# Altium PCB PCB1.PcbDoc
Units mm, origin at the board's own origin, x right, y up, seen from the top; angles counter-clockwise.
Board outline 99.69 x 96.27 mm, 2 copper layers (Top Layer, Bottom Layer); 54 components, 48 nets, 197 pads, 105 vias.
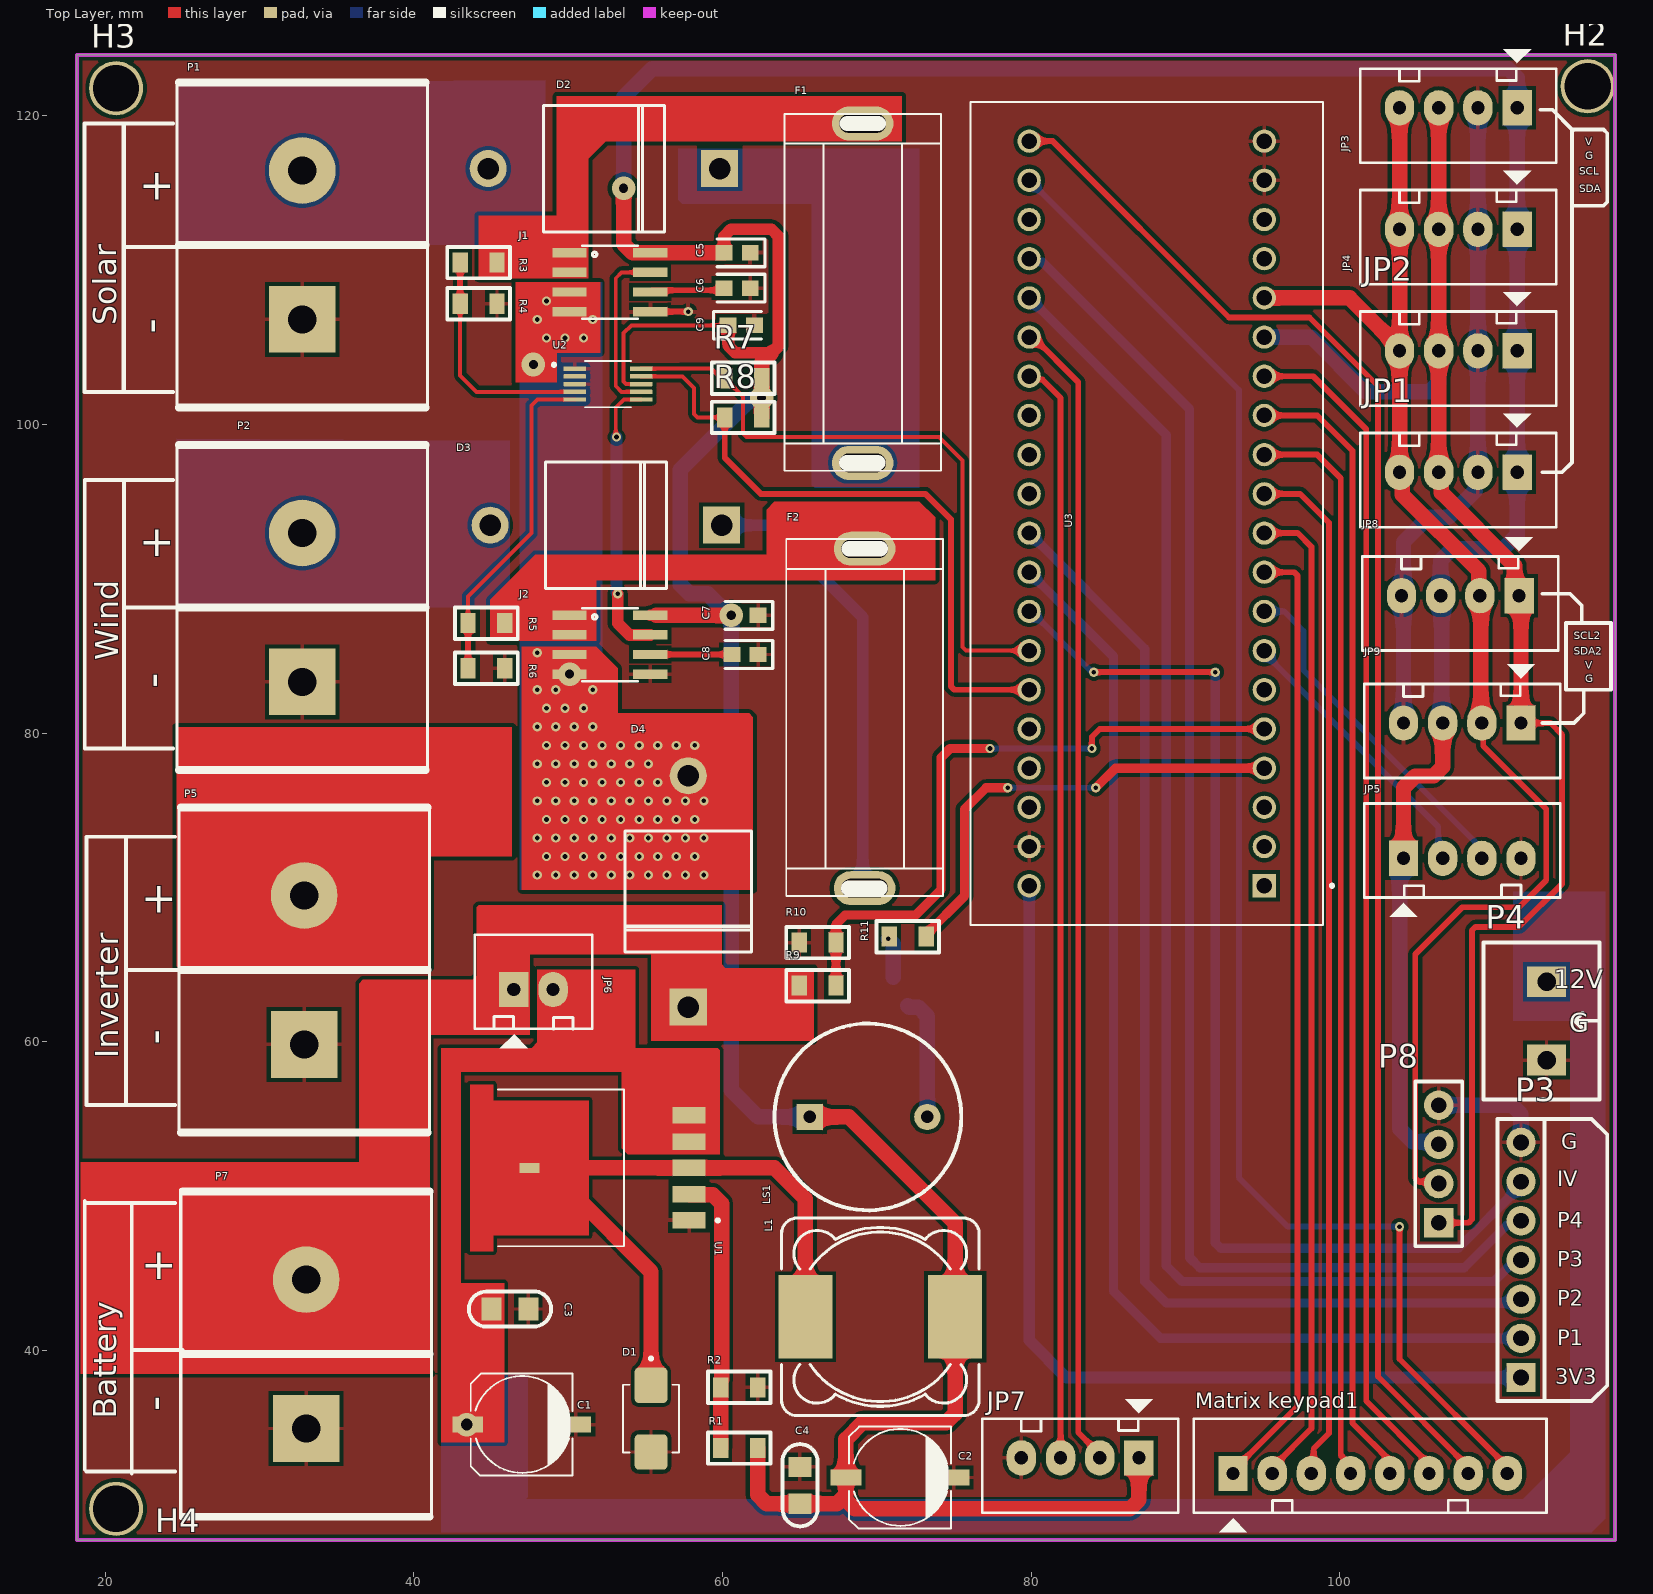
[diagram p0: Top Layer view]
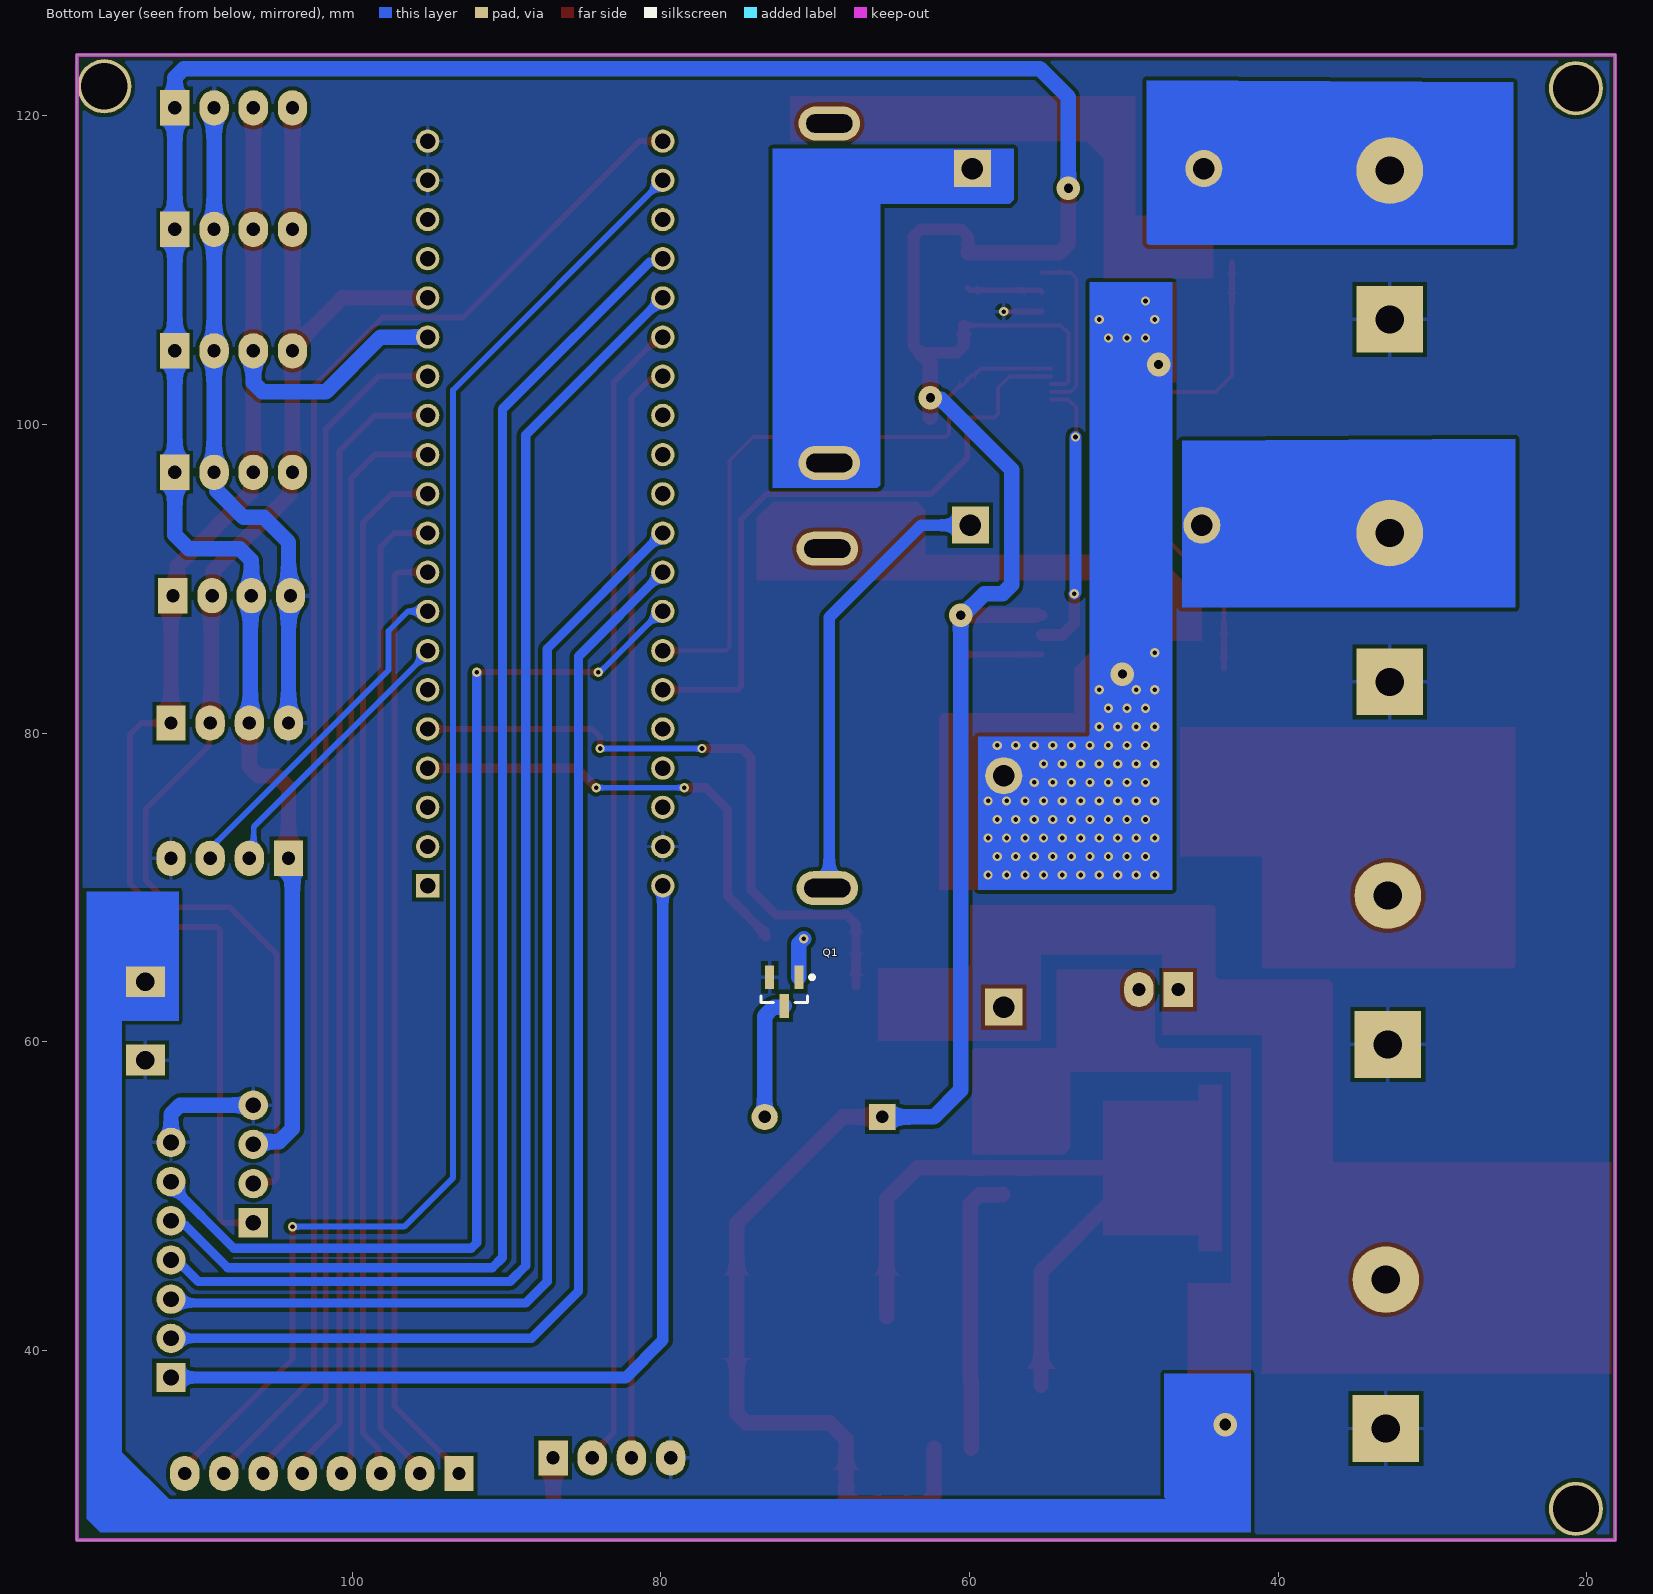
[diagram p1: Bottom Layer view, seen from below]
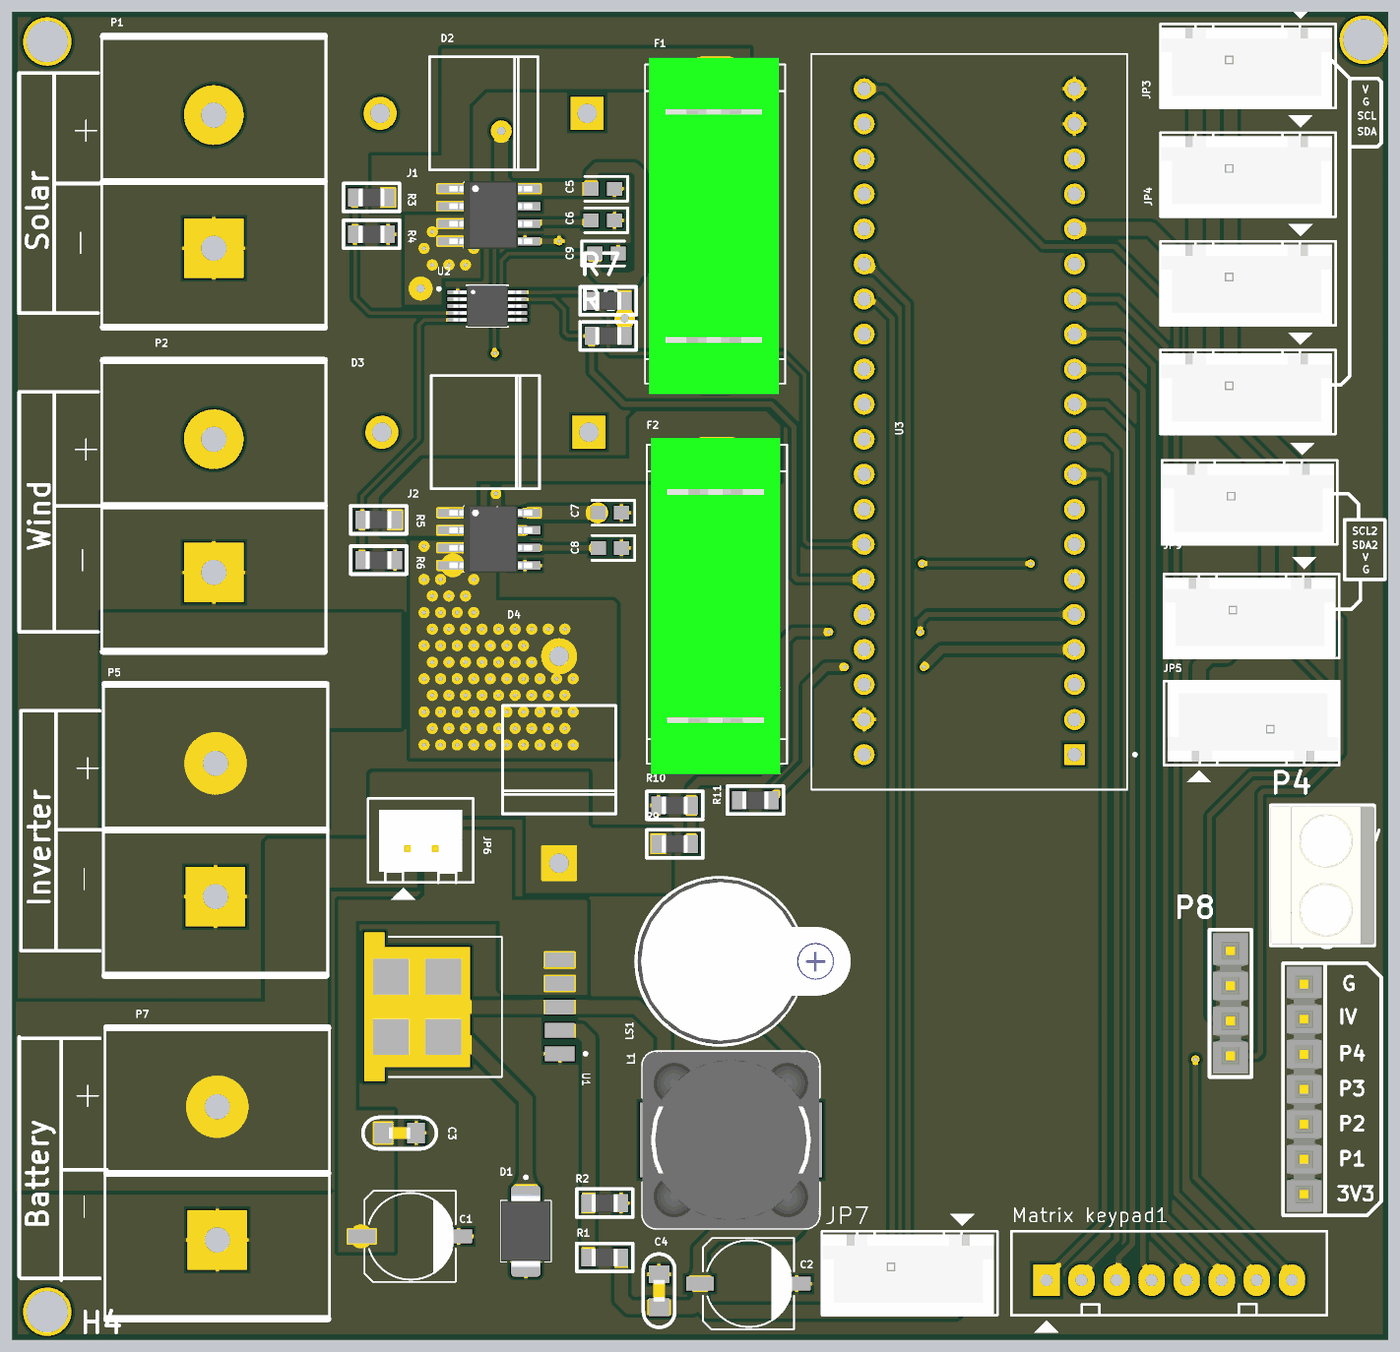
[diagram p2: 3D render of the assembled board from above, using the file's embedded part models]

## Layer stack, top to bottom
Top Solder: solder mask 0.0102, Solder Resist, Dk 3.5
Top Layer: signal copper 0.0356
Dielectric 1: dielectric 0.32, FR-4, Dk 4.8
Bottom Layer: signal copper 0.0356
Bottom Solder: solder mask 0.0102, Solder Resist, Dk 3.5

## Board outline
18.161,27.686 18.161,123.952 117.856,123.952 117.856,27.686

## Design rules (kind name [scope] priority, off if disabled: settings)
Clearance [All] p1: gap=0.254 ignorepadtopadclearanceinfootprint=TRUE
PolygonConnect [All] p1: connectstyle=Relief reliefconductorwidth=0.254 reliefentries=4 polygonreliefangle="90 Angle" airgapwidth=0.254
RoutingVias [All] p1: holewidth=0.3 width=0.6 viastyle="Through Hole" minholewidth=0.3 minwidth=0.6 maxholewidth=3 maxwidth=3
SolderMaskExpansion [All] p1: expansion=0.102 istentingtop=FALSE
Width [All] p1: maxlimit=3 minlimit=0.254 preferedwidth=0.381 toplayer_maxwidth=1.5 minimp=50.000000 maximp=50.000000 favimp=50.000000
30 further rules are at their usual default settings.

## Classes and differential pairs
component class MCU: H2 H3 H4 JP7 JP8 JP9 LS1 "Matrix keypad1" P8 Q1 R11 U3
component class Mainboard: C1 C2 C3 C4 C5 C6 C7 C8 C9 D1 D2 D3 D4 F1 F2 J1 J2 JP1 JP2 JP3 JP4 JP5 JP6 L1 P1 P2 P3 P4 P5 P7 R1 R2 R3 R4 R5 R6 R7 R8 R9 R10 U1 U2

## Components (designator, comment, footprint, x,y, rotation, side; value= is the part's Value field where it differs from the comment)
C1 "47uF" CAP_SMD_6_3MM 46.99,35.179 r0 top
C2 "47uF" CAP_SMD_6_3MM 71.501,31.75 r0 top
C3 "Cap Non-pol" C-NP-0805 46.228,42.672 r180 top value=0.1uF
C4 "Cap Non-pol" C-NP-0805 65.024,31.242 r270 top value=0.1uF
C5 "0.1uF" C1608-0603 60.96,111.125 r180 top
C6 "1nF" C1608-0603 60.96,108.839 r180 top
C7 "0.1uF" C1608-0603 61.468,87.63 r180 top
C8 "1nF" C1608-0603 61.468,85.09 r180 top
C9 "1uF" C1608-0603 61.214,106.426 r0 top
D1 "SS24" DIOM5336X265N 55.372,35.56 r270 top
D2 "" D8x7,5 59.817,116.586 r180 top
D3 "" D8x7,5 59.944,93.472 r180 top
D4 "" D8x7,5 57.785,62.23 r90 top
F1 "FUSE" "FUSE 24.5x9.5" 69.088,97.507 r90 top
F2 "FUSE" "FUSE 24.5x9.5" 69.215,69.948 r90 top
H2 "Hole" "LO KHOAN 3MM" 116.078,121.92 r0 top
H3 "Hole" "LO KHOAN 3MM" 20.701,121.793 r0 top
H4 "Hole" "LO KHOAN 3MM" 20.701,29.718 r0 top
J1 "ACS712" SO08 52.705,109.22 r270 top
J2 "ACS712" SO08 52.705,85.725 r270 top
JP1 "JP4" CON4 111.506,96.901 r180 top value="Connector 4"
JP2 "JP4" CON4 111.506,104.775 r180 top value="Connector 4"
JP3 "JP4" CON4 111.506,120.523 r180 top value="Connector 4"
JP4 "JP4" CON4 111.506,112.649 r180 top value="Connector 4"
JP5 "JP4" CON4 104.14,71.882 r0 top value="Connector 4"
JP6 "Switch" CON2 46.482,63.373 r0 top value="Connector 2"
JP7 "GPS" CON4 86.995,33.02 r180 top value="Connector 4"
JP8 "LCD_2004" CON4 111.633,88.9 r180 top value="Connector 4"
JP9 "Backup" CON4 111.76,80.645 r180 top value="Connector 4"
L1 "Inductor" "INDUCTOR 12.5x12.5" 70.231,42.164 r0 top value=10mH
LS1 "Buzzer" Buzzer 65.659,55.118 r0 top
"Matrix keypad1" "JP8" CON8 93.091,32.004 r0 top value="Connector 8"
P1 "Solar Power" "PTBlock 2" 32.766,106.807 r90 top
P2 "Wind Power" "PTBlock 2" 32.766,83.312 r90 top
P3 "Header 7" "Header 7" 111.76,38.227 r90 top
P4 "Header 2 - M" "Medium - Header 2" 113.411,61.341 r270 top
P5 "Header 2" "PTBlock 2" 32.893,59.817 r90 top
P7 "Battery" "PTBlock 2" 33.02,34.925 r90 top
P8 "Header 4" "Header 4" 106.426,48.26 r90 top
Q1 "C1815" "SOT23 [C1815]" 72.009,63.246 r270 bottom
R1 "RESISTOR" R-0805 61.087,33.655 r0 top value=10.5
R2 "RESISTOR" R-0805 61.087,37.592 r180 top value=2k
R3 "RESISTOR" R-0805 44.196,110.49 r0 top value=1K
R4 "RESISTOR" R-0805 44.196,107.823 r180 top value=1K
R5 "RESISTOR" R-0805 44.704,87.122 r0 top value=1K
R6 "RESISTOR" R-0805 44.704,84.201 r180 top value=1K
R7 "RESISTOR" R-0805 61.341,102.997 r180 top value=1K
R8 "RESISTOR" R-0805 61.341,100.457 r180 top value=1K
R9 "RESISTOR" R-0805 66.167,63.627 r180 top value=1K
R10 "RESISTOR" R-0805 66.167,66.421 r0 top value=1K
R11 "RESISTOR" R-0805 72.009,66.802 r180 top value=100R
U1 "XL4015" CONV_XL4015 47.498,51.816 r180 top
U2 "ADS1115IDGSR" SOP50P490X110-10N 52.578,102.616 r0 top
U3 "ZC323000" MODULE_ZC323000 87.503,94.234 r180 top

## Footprints (in the part's own frame and the unit in brackets; to place one, negate y for a bottom-side part, rotate by r counter-clockwise, add the part's x,y. Pads: shape width x height; smd on the part's side, far side on the other; paste and mask are expansions set on the pad)
Buzzer [mil] "Buzzer; Solder Pad 35mil"
  rect 67x67 hole 32: 1(0,0)
  round 67 hole 32: 2(300,0)
  silkscreen extent -90,-238 387,238, body extent -86,-236 522,236, height 177
C1608-0603 [mm] "Capacitor Chip 0603 package"
  rect 1.1x1 smd: 1(-0.843,0.001) 2(0.857,0.001)
  silkscreen extent -1.79,-0.9 1.31,0.9, body extent -0.71,-0.43 0.71,0.43, height 0.81
C-NP-0805 [mm] "Chip Capacitor; Non-polarized; Body 2.0 x 1.3 mm (LxW typ) [2012]"
  rect 1.3x1.5 smd: 1(-1.194,0) 2(1.194,0)
  silkscreen extent -2.67,-1.14 2.66,1.14, body extent -0.8,-0.43 0.8,0.43, height 0.79
CAP_SMD_6_3MM [mm] "47uF 25V"
  rect 2x1.016 smd: 1(-3.5,0) 2(3.5,0)
  silkscreen extent -3.3,-3.3 3.3,3.3, body extent -3.79,-3.25 3.75,3.25, height 5.52
CON2 [mil] "CON2"
  rect 75x90 hole 34: 1(0,0)
  oval 75x90 hole 34: 2(100,0)
  silkscreen extent -100,-150 200,140, body extent -68,-70 168,107, height 236
CON4 [mil] "CON4"
  rect 75x90 hole 34: 1(0,0)
  oval 75x90 hole 34: 2(100,0) 3(200,0) 4(300,0)
  silkscreen extent -100,-150 400,140, body extent -90,-90 398,136, height 276
CON8 [mil] "CON8"
  rect 75x90 hole 34: 1(0,0)
  oval 75x90 hole 34: 2(100,0) 3(200,0) 4(300,0) 5(400,0) 6(500,0) 7(600,0) 8(700,0)
  silkscreen extent -100,-150 800,140
CONV_XL4015 [mm]
  rect 2.16x1.07 smd: 1(-10.335,3.4) 2(-10.335,1.7) 3(-10.335,0) 4(-10.335,-1.7) 5(-10.335,-3.4)
  rect 1.27x0.635 smd paste-2 mask+0: 3.1(0,0)
  Top Layer region: 3.835,-5.4 2.365,-5.4 2.365,-4.35 -3.835,-4.35 -3.835,4.35 2.365,4.35 2.365,5.4 3.835,5.4
  silkscreen extent -12.3,-5.08 2.05,5.08
D8x7,5 [mm]
  round 2.4 hole 1.4: A(15,0)
  rect 2.4x2.4 hole 1.4: K(0,0)
  silkscreen extent 3.57,-4.1 11.42,4.1
DIOM5336X265N [mm]
  rrect25% 2.29x2.12 smd: A(2.16,0) C(-2.16,0)
  silkscreen extent -4,-1.81 2.2,1.81, body extent -2.67,-1.81 2.67,1.81, height 2.65
"FUSE 24.5x9.5" [mm]
  oval 2.2x4 hole 1.2 slot 3 at 90 deg: 1(0,0) 2(22,0)
  silkscreen extent -0.51,-5.08 22.62,5.08, body extent -1.28,-4.6 23.12,4.8, height 11.5
"Header 4" [mil] "Connector; Header; 4 Position; Solder Pad 35mil"
  rect 75x75 hole 40: 1(0,0)
  round 75 hole 40: 2(100,0) 3(200,0) 4(300,0)
  silkscreen extent -60,-60 360,60, body extent -50,-50 350,50, height 330
"Header 7" [mil] "Connector; Header; 7 Position; Solder Pad 35mil"
  rect 75x75 hole 40: 1(0,0)
  round 75 hole 40: 2(100,0) 3(200,0) 4(300,0) 5(400,0) 6(500,0) 7(600,0)
  silkscreen extent -60,-60 660,60, body extent -50,-50 650,50, height 330
"INDUCTOR 12.5x12.5" [mm]
  rect 3.5x5.4 smd: 1(-4.85,0) 2(4.85,0)
  silkscreen extent -6.4,-6.4 6.4,6.4, body extent -6.4,-6.4 6.4,6.4, height 8
"LO KHOAN 3MM" [mil]
  round 138 hole 118.1: 1(0,0)
"Medium - Header 2" [mm]
  rect 2x2.5 hole 1.2: 1(-2.54,0) 2(2.54,0)
  silkscreen extent -5.08,-4.08 5.08,3.43, body extent -5,-4.07 5,3.43, height 10
MODULE_ZC323000 [mm]
  rect 1.508x1.508 hole 1: 1(-7.62,24.13)
  round 1.508 hole 1: 2(-7.62,21.59) 3(-7.62,19.05) 4(-7.62,16.51) 5(-7.62,13.97) 6(-7.62,11.43) 7(-7.62,8.89) 8(-7.62,6.35) 9(-7.62,3.81) 10(-7.62,1.27) 11(-7.62,-1.27) 12(-7.62,-3.81) 13(-7.62,-6.35) 14(-7.62,-8.89) 15(-7.62,-11.43) 16(-7.62,-13.97) 17(-7.62,-16.51) 18(-7.62,-19.05) 19(-7.62,-21.59) 20(-7.62,-24.13) 21(7.62,-24.13) 22(7.62,-21.59) 23(7.62,-19.05) 24(7.62,-16.51) 25(7.62,-13.97) 26(7.62,-11.43) 27(7.62,-8.89) 28(7.62,-6.35) 29(7.62,-3.81) 30(7.62,-1.27) 31(7.62,1.27) 32(7.62,3.81) 33(7.62,6.35) 34(7.62,8.89) 35(7.62,11.43) 36(7.62,13.97) 37(7.62,16.51) 38(7.62,19.05) 39(7.62,21.59) 40(7.62,24.13)
  silkscreen extent -12.1,-26.67 11.43,26.67
"PTBlock 2" [mil] "Connector; Terminal; Power; 2 Positions; Solder Pad 35mil"
  rect 170x170 hole 72: 1(0,0)
  round 170 hole 72: 2(380,0)
  silkscreen extent -230,-320 610,320, body extent -245,-324 625,324, height 472
R-0805 [mm] "Chip Resistor; Body 2.0 x 1.3 mm (LxW typ) [2012]"
  rect 1x1.3 smd: 1(-1.194,0) 2(1.194,0)
  silkscreen extent -2.03,-1.02 2.03,1.02, body extent -0.95,-0.65 0.95,0.65, height 0.63
SO08 [mil]
  rect 24x87 smd: 1(-75,-103) 2(-25,-103) 3(25,-103) 4(75,-103) 5(75,103) 6(25,103) 7(-25,103) 8(-75,103)
  silkscreen extent -93,-71 93,71, body extent -96,-113 96,123, height 69
SOP50P490X110-10N [mm]
  rrect25% 1.47x0.28 smd: 1(-2.15,1) 2(-2.15,0.5) 3(-2.15,0) 4(-2.15,-0.5) 5(-2.15,-1) 6(2.15,-1) 7(2.15,-0.5) 8(2.15,0) 9(2.15,0.5) 10(2.15,1)
  silkscreen extent -3.6,-1.5 1.5,1.5, body extent -2.45,-1.5 2.45,1.5, height 1.1
"SOT23 [C1815]" [mm] "SOT23, 3-Leads, Body 3.0x2.6mm (max), Pitch 0.95mm, IPC Medium Density"
  rect 1.55x0.6 smd: 1(-0.925,0.95) 2(-0.925,-0.95) 3(0.925,0)
  silkscreen extent -1.05,-1.5 0.7,1.92, body extent -1.53,-1.5 1.53,1.5, height 1.1

## Part data
C1 C2: library part Cap_Pol, "Polarized Capacitor", Manufacturer=FARNELL, Volt=25V, AEMS Code=2100110, ComponentLink1Description="Digikey Part Link", ComponentLink2Description="Open Datasheet", ComponentLink2URL=H:\LIBRARY\LIBRARY.Datasheet\, Published=13-April-2009, Publisher="Hoang Nguyen", Vendor=Digikey
C3 C4: "Non-polarized Capacitor", LatestRevisionDate=17-Jul-2002, LatestRevisionNote="Re-released for DXP Platform.", PackageReference=RAD-0.3, Published=8-Jun-2000, Publisher="Altium Limited"
C5 C6 C7 C8 C9: library part Capacitor, "Capacitor", Volt=16V, AEMS Code=2100341, ComponentLink1Description="Digikey Part Link", ComponentLink2Description="Open Datasheet", ComponentLink2URL=H:\LIBRARY\LIBRARY.Datasheet\, Published=13-April-2009, Publisher="Hoang Nguyen", Vendor=Digikey
D1: "Diode Schottky 40V 2A Surface Mount DO-214AA (SMB)", Package="DO-214AA ON Semiconductor", Availability="In Stock", Check_prices=https://www.snapeda.com/parts/SS24/Onsemi/view-part/?ref=eda, MF="ON Semiconductor", MP=SS24, Price=None, SnapEDA_Link=https://www.snapeda.com/parts/SS24/Onsemi/view-part/?ref=snap
D2 D3 D4: library part Schottky-Diode, Datasheet=https://diotec.com/de/produktliste/SBD.html, ki_description="Schottky Diode", ki_keywords=Schottky
F1 F2: library part FUSE_1, ComponentLink1Description="Digikey Part Link", ComponentLink2Description="Open Datasheet", ComponentLink2URL=H:\LIBRARY\LIBRARY.Datasheet\, Published=13-April-2009, Publisher="Hoang Nguyen", Vendor=Digikey
H2 H3 H4: "Hole 3mm"
J1 J2: "Current Sensor 20A 1 Channel Hall Effect, Open Loop Bidirectional 8-SOIC (0.154, 3.90mm Width)", Package="PowerWFQFN-12 Allegro MicroSystems LLC", Check_prices=https://www.snapeda.com/parts/ACS712/Allegro+MicroSystems+LLC/view-part/?ref=eda, MF="Allegro MicroSystems", MP=ACS712, SnapEDA_Link=https://www.snapeda.com/parts/ACS712/Allegro+MicroSystems+LLC/view-part/?ref=snap
JP1 JP2 JP3 JP4 JP5 JP7 JP8 JP9: library part Con4, "Connector 4"
JP6: library part Con2, "Connector 2"
LS1: "Magnetic Transducer Buzzer", ComponentLink1Description="Manufacturer Link", ComponentLink1URL=http://www.megastar.com/linecard/buzzmode/index.php, DatasheetDocument=17-Dec-2003, LatestRevisionDate=17-Dec-2003, LatestRevisionNote="Schematic revised, PCB Footprint replaced.", PackageReference=ABSM-1574, Published=24-Mar-1999, Publisher="Altium Limited"
"Matrix keypad1": library part Con8, "Connector 8"
P1 P2 P7: library part "Header 2", "Header, 2-Pin", LatestRevisionDate=17-Jul-2002, LatestRevisionNote="Re-released for DXP Platform.", Publisher="Altium Limited"
P3: "Header, 7-Pin", LatestRevisionDate=17-Jul-2002, LatestRevisionNote="Re-released for DXP Platform.", Publisher="Altium Limited"
P4: "Header, 2-Pin, Medium", LatestRevisionDate=17-Jul-2002, LatestRevisionNote="Re-released for DXP Platform.", Publisher="Altium Limited"
P5: "Header, 2-Pin", LatestRevisionDate=17-Jul-2002, LatestRevisionNote="Re-released for DXP Platform.", Publisher="Altium Limited"
P8: "Header, 4-Pin", LatestRevisionDate=17-Jul-2002, LatestRevisionNote="Re-released for DXP Platform.", Publisher="Altium Limited"
Q1: "Q2SC1815", PSpiceTemplate="Q^@REFDES %c %b %e @MODEL", COMPONENT=2SC1815, ComponentLink1Description="Digikey Part Link", ComponentLink2Description="Open Datasheet", ComponentLink2URL=H:\LIBRARY\LIBRARY.Datasheet\, Price=500VND, Published=13-April-2009, Publisher="Hoang Nguyen", Vendor=Digikey
R1 R2 R3 R4 R5 R6 R7 R8 R9 R10 R11: "Resistor", LatestRevisionDate=17-Jul-2002, LatestRevisionNote="Re-released for DXP Platform.", PackageReference=AXIAL-0.3, Published=8-Jun-2000, Publisher="Altium Limited"
U1: "5A 180KHz 36V Buck DC to DC Converter", Package=None, Availability=Unavailable, MP=XL4015, Price=None
U2: Package=None, Availability=Unavailable, MP=altium_native_batch, Price=None
U3: "STM32F103C8T6 ARM STM32 Minimum System Development Board Module For Arduino", Package=None, Availability=Unavailable, MP=ZC323000, Price=None

## Via types
v1: diameter 0.6, hole 0.3, Top Layer to Bottom Layer, 99 vias
v2: diameter 1.524, hole 0.6, Top Layer to Bottom Layer, 5 vias
v3: diameter 1.524, hole 0.762, Top Layer to Bottom Layer, 1 vias

## Nets (pads, with @x,y where several pads share a name; then routed paths per layer and width w, separated by ;. In a path a pad name is that pad's centre, name@x,y a point inside that pad or via, vN(x,y) a via of type N, cw(c..) or ccw(c..) an arc to the next point about the centre after c; other vN are vias at no path point)
3V3: P3.1 U3.40 | length 62.3
  Bottom Layer w0.762: U3.40 79.883,40.64 82.296,38.227 P3.1
+5: U3.38
+12: C1.1 C3.2 JP6.2 P4.1 U1.4 U1.5 | length 51.8
  Top Layer w1: v3(43.434,35.179) C1.1 43.982,35.179 45.034,36.231 C3.2 43.131,42.672 42.545,43.258 42.545,58.215 43.131,58.801 50.8,58.801 ; JP6.2 49.022,60.579 51.054,58.547 57.247,58.547 57.833,57.961 U1.5 U1.4
AI0: J1.7 U2.7 | length 11.2
  Top Layer w0.254: U2.7 53.459,102.116 53.086,102.489 53.086,109.474 53.467,109.855 J1.7
AI1: J2.7 U2.6 | length 18.3
  Top Layer w0.254: v1(53.132,99.187) 53.086,99.233 53.086,101.092 53.61,101.616 U2.6
  Top Layer w0.762: v1(53.213,89.027) 53.213,87.122 53.975,86.36 J2.7
  Bottom Layer w0.762: v1(53.132,99.187) 53.132,89.108 v1(53.213,89.027)
AV0: R3.1 R4.2 U2.4 | length 15.2
  Top Layer w0.254: R4.2 43.002,103.175 44.061,102.116 U2.4
  Top Layer w0.381: R4.2 R3.1
AV1: R5.1 R6.2 U2.5 | length 21.7
  Top Layer w0.254: R5.1 43.51,88.849 47.625,92.964 47.625,101.219 48.022,101.616 U2.5
  Top Layer w0.381: R6.2 R5.1
AV2: R9.1 R10.2 U3.5 | length 42.4
  Top Layer w0.381: v1(83.947,78.994) 83.947,79.756 84.455,80.264 U3.5
  Top Layer w0.6: R9.1 R10.2 67.361,67.613 67.947,68.199 72.517,68.199 74.168,69.85 74.168,78.408 74.754,78.994 v1(77.343,78.994)
  Bottom Layer w0.381: v1(77.343,78.994) v1(83.947,78.994)
BOOT0: U3.1
Bz: R11.1 U3.4 | length 29.8
  Top Layer w0.6: R11.1 73.203,66.952 75.692,69.441 75.692,75.057 77.089,76.454 v1(78.486,76.454) ; v1(84.201,76.454) 85.471,77.724 U3.4
  Bottom Layer w0.381: v1(78.486,76.454) v1(84.201,76.454)
C1: "Matrix keypad1.4" U3.12 | length 70.4
  Top Layer w0.381: U3.12 98.552,98.044 100.076,96.52 100.076,33.18 100.711,32.545 100.711,32.004
C2: "Matrix keypad1.3" U3.11 | length 66.9
  Top Layer w0.381: U3.11 97.44,95.504 99.314,93.63 99.314,34.615 98.322,33.622 98.322,32.155 98.298,32.131
C3: "Matrix keypad1.2" U3.10 | length 64.4
  Top Layer w0.381: U3.10 97.282,92.964 98.171,92.075 98.171,34.925 95.758,32.512 95.758,32.131
C4: "Matrix keypad1.1" U3.9 | length 62
  Top Layer w0.381: 93.218,32.131 93.218,32.322 97.282,36.386 97.282,90.201 97.059,90.424 U3.9
DC_Bus: D4.A J1.3 J1.4 J2.3 J2.4 | length 7.5
  Top Layer w1: v2(47.752,103.886) 47.852,103.986 47.852,105.488 49.679,107.315 J1.4 J1.3 ; 48.641,84.201 48.827,84.015 49.894,84.015 v2(50.089,83.82)
  other v1: 48,70.8 49.2,70.8 50.4,70.8 51.6,70.8 52.8,70.8 54,70.8 55.2,70.8 56.4,70.8 57.6,70.8 58.8,70.8 48.6,72 49.8,72 51,72 52.2,72 53.4,72 54.6,72 55.8,72 57,72 58.2,72 48,73.2 49.2,73.2 50.4,73.2 51.6,73.2 52.8,73.2 54,73.2 55.2,73.2 56.4,73.2 57.6,73.2 58.8,73.2 48.6,74.4 49.8,74.4 51,74.4 52.2,74.4 53.4,74.4 54.6,74.4 55.8,74.4 57,74.4 58.2,74.4 48,75.6 49.2,75.6 50.4,75.6 51.6,75.6 52.8,75.6 54,75.6 55.2,75.6 56.4,75.6 57.6,75.6 58.8,75.6 48.6,76.8 49.8,76.8 51,76.8 52.2,76.8 53.4,76.8 54.6,76.8 55.8,76.8 48,78 49.2,78 50.4,78 51.6,78 52.8,78 54,78 55.2,78 48.6,79.2 49.8,79.2 51,79.2 52.2,79.2 53.4,79.2 54.6,79.2 55.8,79.2 57,79.2 58.2,79.2 48,80.4 49.2,80.4 50.4,80.4 51.6,80.4 48.6,81.6 49.8,81.6 51,81.6 48,82.8 49.2,82.8 51.6,82.8 48,85.2 48.6,105.6 49.8,105.6 51,105.6 48,106.8 51.6,106.8 48.6,108
GND: C1.2 C2.2 C3.1 C4.1 C5.1 C6.1 C7.1 C8.1 C9.2 D1.A J1.5 J2.5 JP1.2 JP2.2 JP3.2 JP4.2 JP5.4 JP7.4 JP8.4 JP9.4 P1.1 P2.1 P3.7 P4.2 P5.1 P7.1 P8.4 Q1.2 R2.1 R4.1 R6.1 R10.1 U1.1 U2.1 U2.3 U3.19 U3.20 U3.39 | length 52.5
  Top Layer w0.381: J1.5 v1(57.785,107.315)
  Bottom Layer w1: JP9.4 104.14,88.9 104.14,92.378 105.742,93.98 107.061,93.98 108.793,95.712 108.793,96.728 JP1.2 JP2.2 JP4.2 JP3.2 ; P8.4 111.174,55.88 111.76,55.294 P3.7
GPS_RX: JP7.2 U3.26 | length 74.7
  Top Layer w0.381: U3.26 80.137,105.664 83.058,102.743 83.058,34.671 84.455,33.274 JP7.2
GPS_TX: JP7.3 U3.27 | length 71.3
  Top Layer w0.381: U3.27 80.099,102.908 80.734,102.908 81.915,101.727 JP7.3
IV: P5.2 | length 16.6
  Top Layer w0.762: P5.2 36.322,72.898 43.815,72.898 45.085,74.168 45.085,76.617
NetC6_2: C6.2 J1.6 | length 4.9
  Top Layer w0.381: J1.6 55.435,108.699 59.965,108.699 C6.2
NetC8_2: C8.2 J2.6 | length 5.3
  Top Layer w0.381: J2.6 60.486,85.09 C8.2@60.611,85.216
NetD1_C: D1.C L1.1 U1.3 U1.3.1 | length 39.2
  Top Layer w1: D1.C 55.372,45.085 50.309,50.148 50.309,50.976 51.149,51.816 U1.3 63.373,51.816 65.381,49.808 L1.1
NetD2_A: D2.A P1.2 | length 12.3
  Bottom Layer w0.762: P1.2 32.982,116.243 44.031,116.243 44.374,116.586 D2.A
NetD2_K: D2.K F1.1 | length 27.6
  Bottom Layer w0.762: D2.K 67.564,116.586 69.215,114.935 69.215,97.634 F1.1
NetD3_A: D3.A P2.2 | length 12.4
  Bottom Layer w0.762: P2.2 33.02,93.218 44.69,93.218 D3.A
NetD3_K: D3.K F2.1 | length 29.2
  Bottom Layer w0.762: D3.K 63.119,93.472 69.088,87.503 69.088,70.075 F2.1
NetLS1_2: LS1.2 Q1.3 | length 8.1
  Bottom Layer w1: Q1.3 72.1,62.23 72.693,62.23 73.279,61.644 LS1.2
NetQ1_1: Q1.1 R11.2 | length 2.6
  Bottom Layer w1: v1(70.739,66.675) 71.059,66.355 Q1.1
NetR1_1: R1.1 R2.2 U1.2 | length 18.2
  Top Layer w1: U1.2 57.868,50.081 59.358,50.081 59.944,49.495 59.944,38.086 59.893,38.035 R2.2 R1.1
R1: "Matrix keypad1.8" U3.22 | length 100.8
  Top Layer w0.381: v1(103.886,48.006) 103.886,39.433 110.998,32.322 110.998,32.131
  Bottom Layer w0.381: U3.22 93.472,102.235 93.472,51.181 96.647,48.006 v1(103.886,48.006)
R2: "Matrix keypad1.7" U3.21 | length 102
  Top Layer w0.381: U3.21 81.407,118.364 92.837,106.934 98.044,106.934 102.489,102.489 102.489,38.291 108.458,32.322 108.458,32.131
R3: "Matrix keypad1.6" U3.14 | length 77.3
  Top Layer w0.381: U3.14 98.298,103.124 101.727,99.695 101.727,36.703 105.918,32.512 105.918,32.131
R4: "Matrix keypad1.5" U3.13 | length 73.9
  Top Layer w0.381: U3.13 98.552,100.584 100.838,98.298 100.838,35.274 103.378,32.734 103.378,32.131
RX: JP5.2 U3.7 | length 18.2
  Bottom Layer w0.381: U3.7 95.123,85.192 106.396,73.919 106.396,72.166 JP5.2
SCL1: R7.2 U2.10 U3.34 | length 41.4
  Top Layer w0.254: U2.10 57.261,103.616 57.277,103.632 59.258,103.632 59.688,103.203 59.838,103.203 R7.2@60.147,102.893 ; R7.2 60.147,102.847 60.457,102.537 60.607,102.537 61.341,101.803 61.341,99.41 61.564,99.187 74.041,99.187 75.565,97.663 75.565,85.567 75.788,85.344 U3.34
SCL2: JP1.3 JP2.3 JP3.3 JP4.3 JP8.1 JP9.1 P8.1 U3.15 | length 97.9
  Top Layer w0.381: P8.1 108.362,48.26 108.585,48.483 108.585,67.214 108.808,67.437 111.633,67.437 114.427,70.231 114.427,79.883 113.665,80.645 JP9.1
  Top Layer w1: JP3.3 JP4.3 JP2.3 JP1.3 106.599,96.728 106.599,95.585 111.35,90.834 111.35,89.31 111.76,88.9 JP9.1
  Bottom Layer w1: U3.15 98.171,105.664 101.715,102.12 105.84,102.12 106.426,102.706 JP2.3
SDA1: R8.2 U2.9 U3.35 | length 41.9
  Top Layer w0.254: U2.9 57.412,103.116 58.166,102.362 58.166,100.68 58.389,100.457 R8.2
  Top Layer w0.381: R8.2@60.147,99.949 60.147,97.841 62.484,95.504 73.152,95.504 74.803,93.853 74.803,83.027 75.026,82.804 U3.35
SDA2: JP1.4 JP2.4 JP3.4 JP4.4 JP8.2 JP9.2 P8.2 U3.16 | length 90.8
  Top Layer w0.381: P8.2 106.299,50.927 105.125,50.927 104.902,51.15 104.902,65.659 107.95,68.707 111.633,68.707 113.393,70.467 113.393,75.075 109.313,79.155 109.313,80.552 JP9.2
  Top Layer w1: U3.16 100.647,108.204 JP2.4@103.886,104.965 ; JP3.4 JP4.4 JP2.4@103.886,104.965 ; JP9.2 109.156,80.709 109.156,88.837 JP8.2 109.026,88.967 109.026,90.491 104.059,95.458 104.059,96.728 JP1.4 JP2.4 JP2.4@103.886,104.965
SIV: P3.6 U3.33 | length 72.6
  Top Layer w0.381: v1(84.074,83.947) v1(91.948,83.947)
  Bottom Layer w0.381: U3.33 80.01,87.884 83.947,83.947 v1(84.074,83.947)
  Bottom Layer w0.6: v1(91.948,83.947) 91.948,46.96 92.299,46.609 107.696,46.609 111.76,50.673 P3.6
Solar: F1.2 J1.1 J1.2 R3.2 | length 31.6
  Top Layer w0.762: R3.2 50.089,110.49 J1.1 50.089,117.653 51.943,119.507 F1.2
SP1: P3.2 U3.32 | length 76.5
  Bottom Layer w0.6: U3.32 85.344,84.963 85.344,43.815 88.392,40.767 P3.2
SP2: P3.3 U3.31 | length 76.7
  Bottom Layer w0.6: U3.31 87.376,85.471 87.376,44.45 88.769,43.057 111.51,43.057 P3.3
SP3: P3.4 U3.25 | length 90.4
  Bottom Layer w0.6: U3.25 88.773,99.314 88.773,45.466 89.789,44.45 109.982,44.45 110.86,45.328 110.887,45.328 111.407,45.847 P3.4
SP4: P3.5 U3.24 | length 92.4
  Bottom Layer w0.6: U3.24 80.099,110.528 80.737,110.528 90.266,101 90.266,46.005 90.932,45.339 108.08,45.339 110.837,48.095 111.468,48.095 P3.5
TX: JP5.3 U3.8 | length 22.6
  Bottom Layer w0.381: U3.8 96.393,87.884 97.663,86.614 97.663,84.074 108.746,72.991 108.746,72.959 109.22,72.485 JP5.3
Vbat: D4.K JP6.1 P7.2 R9.2 | length 56.8
  Top Layer w1: P7.2 37.592,44.577 39.624,46.609 39.624,62.787 40.21,63.373 JP6.1 46.482,65.786 47.117,66.421 57.453,66.421 58.039,65.835 58.039,62.484 D4.K 63.726,62.23 64.973,63.477 R9.2
VCC: C2.1 C4.2 C5.2 C7.2 C9.1 J1.8 J2.8 JP1.1 JP2.1 JP3.1 JP4.1 JP5.1 JP7.1 JP8.3 JP9.3 L1.2 LS1.1 P8.3 R1.2 R7.1 R8.1 U2.8 | length 313.3
  Top Layer w0.254: U2.8 54.715,102.629 53.743,102.629 53.594,102.778 53.594,105.918 54.103,106.427 C9.1
  Top Layer w0.762: J2.8 J2.8@55.719,87.63 ; C5.2 60.103,112.203 60.55,112.649 63.181,112.649 63.627,112.203 63.627,105.094 63.181,104.648 60.817,104.648 60.371,105.094 C9.1
  Top Layer w1: v2(53.594,115.316) 53.594,111.711 54.18,111.125 60.052,111.125 60.053,111.124 C5.2 ; J2.8@55.719,87.63 C7.2@60.56,87.63 ; R1.2 62.281,30.634 62.867,30.048 C4.2 67.415,30.048 68.001,30.634 ; R8.1 R7.1 62.535,104.002 63.181,104.648 ; LS1.1 68.199,55.118 75.081,48.236 L1.2 75.081,35.892 74.495,35.306 69.088,35.306 68.001,34.219 C2.1 68.001,30.634 ; JP7.1 86.995,30.304 86.409,29.718 68.587,29.718 68.001,30.304 68.001,30.634 ; JP5.1 104.14,76.454 104.902,77.216 106.094,77.216 106.68,77.802 JP9.3
  Bottom Layer w1: v2(53.594,115.316) 53.594,121.207 55.45,123.063 110.92,123.063 111.506,122.477 JP3.1 JP4.1 JP2.1 JP1.1 111.506,92.837 110.617,91.948 107.315,91.948 106.553,91.186 JP8.3 106.617,88.837 106.617,80.709 JP9.3 ; v2(62.535,101.727) 62.435,101.627 61.827,101.627 57.277,97.077 57.277,89.613 57.863,89.027 59.04,89.027 60.437,87.63 v2(60.579,87.63) 60.579,56.847 62.308,55.118 LS1.1 ; JP5.1 103.886,71.628 103.886,54.356 104.729,53.513 106.253,53.513 P8.3
Wind: F2.2 J2.1 J2.2 R5.2 | length 5.7
  Top Layer w0.762: R5.2 48.933,87.122 49.441,87.63 J2.1 J2.2
pads on no net: H2.1 H3.1 H4.1 U2.2 U3.2 U3.3 U3.6 U3.17 U3.18 U3.23 U3.28 U3.29 U3.30 U3.36 U3.37

## Polygon pours and split planes (outlines as drawn)
GND on Bottom Layer "GND_L02_P000" (solid, pour order 0): 18.288,123.825 117.856,123.825 117.729,123.698 117.729,27.813 18.288,27.813
GND on Top Layer "GND_L01_P001" (solid, pour order 1): 18.288,123.952 117.856,123.952 117.856,27.686 117.729,27.813 18.161,27.813

## Keep-outs
Keep-Out Layer:
  the board outline again, w0.254

## Other copper
Top Layer:
  region net DC_Bus: 52.07,109.22 52.07,104.648 49.276,104.648 49.276,102.743 46.609,102.743 46.609,109.22
  region net +12: 54.356,64.643 54.356,59.563 59.69,59.563 59.817,59.436 59.817,52.705 53.848,52.705 53.467,53.086 53.467,58.039 43.053,58.039 43.053,44.323 45.847,44.323 45.847,34.036 41.783,34.036 41.783,59.563 47.625,59.563 48.006,59.944 48.006,64.643
  region net Vbat: 18.415,52.197 18.415,38.481 41.148,38.481 41.021,38.608 41.021,60.452 47.498,60.452 47.498,65.659 55.372,65.659 55.372,60.071 65.913,60.071 65.913,64.77 60.198,64.77 59.944,65.024 59.944,68.834 44.196,68.834 44.069,68.707 44.069,64.262 43.815,64.008 36.703,64.008 36.449,63.754 36.449,52.197
  region net DC_Bus: 46.99,85.598 51.816,85.598 53.213,84.201 53.213,81.28 61.722,81.28 61.976,81.026 61.976,69.85 46.99,69.85
  region net Wind: 44.958,88.646 44.958,85.979 51.816,85.979 51.816,89.916 73.787,89.916 73.787,93.98 72.771,94.996 63.373,94.996 62.865,94.488 62.865,91.567 48.133,91.567 47.879,91.567
  region net Solar: 44.196,109.474 51.308,109.474 51.308,117.221 52.451,118.364 71.628,118.364 71.628,121.285 49.276,121.285 49.276,113.538 44.196,113.538
  region net IV: 46.355,80.391 46.355,72.009 41.021,72.009 41.021,64.77 24.775,64.77 24.765,64.76 24.628,64.897 24.628,80.391
Bottom Layer:
  region net +12: 41.783,38.481 47.371,38.481 47.371,30.48 47.244,30.353 111.887,30.353 114.935,33.401 114.935,61.341 111.252,61.341 111.252,69.723 117.221,69.723 117.221,29.083 116.332,28.194 41.783,28.194
  region net DC_Bus: 46.863,109.22 52.197,109.22 52.197,79.883 52.324,79.756 59.436,79.756 59.436,69.85 46.863,69.85
  region net NetD2_A: 24.765,122.174 24.765,111.633 48.387,111.633 48.514,111.76 48.514,122.301
  region net NetD2_K: 57.15,117.856 72.771,117.856 72.771,95.885 65.973,95.885 65.786,96.072 65.786,114.3 57.404,114.3 57.15,114.554
  region net NetD3_A: 24.638,99.06 24.638,88.138 46.228,88.138 46.228,98.937

## Silkscreen, mask and mechanical layers (free items; w line width, h text height)
Top Overlay:
  lines w0.254: 18.669,32.258 18.669,49.657 ; 18.796,32.131 24.511,32.131 ; 18.796,49.53 24.511,49.53 ; 21.184,102.102 21.184,119.501 ; 21.184,111.5 24.486,111.5 ; 21.209,78.994 21.209,96.393 ; 21.209,88.138 24.511,88.138 ; 21.209,102.108 21.209,119.507 ; 21.209,111.506 24.511,111.506 ; 21.336,55.88 21.336,73.279 ; 21.463,64.643 24.765,64.643 ; 21.717,32.004 21.717,49.403 ; 21.717,40.005 25.019,40.005 ; 24.359,102.102 18.644,102.102 18.644,119.501 24.359,119.501 ; 24.384,78.994 18.669,78.994 18.669,96.393 24.384,96.393 ; 24.384,102.108 18.669,102.108 18.669,119.507 24.384,119.507 ; 24.511,55.88 18.796,55.88 18.796,73.279 24.511,73.279 ; 113.03,120.396 113.792,120.396 115.062,119.126 117.094,119.126 117.348,118.872 117.348,114.427 117.094,114.173 115.062,114.173 ; 113.157,36.703 116.332,36.703 117.348,37.719 117.348,53.975 116.332,54.991 113.284,54.991 ; 113.157,80.645 115.189,80.645 115.824,81.28 115.824,82.677 ; 113.157,89.027 114.935,89.027 115.697,88.265 115.697,87.122 ; 113.157,96.901 114.427,96.901 115.062,97.536 115.062,114.173 ; 115.211,119.126 115.062,118.977 115.062,114.173 ; 115.697,87.122 115.189,87.122 114.681,87.122 114.681,82.804 117.602,82.804 117.602,87.122 115.697,87.122
  text "V" at 115.924,118.083 h0.5
  text "G" at 115.924,117.194 h0.5
  text "SCL" at 115.543,116.178 h0.5
  text "SDA" at 115.543,115.035 h0.5
  text "+" at 22.198,114.575 h2
  text "Solar" at 20.705,106.422 h1.5 r90
  text "-" at 23.887,105.891 h2 r90
  text "+" at 22.198,91.461 h2
  text "SCL2" at 115.162,86.079 h0.5
  text "SDA2" at 115.162,85.063 h0.5
  text "Wind" at 20.832,84.705 h1.5 r90
  text "V" at 115.924,84.174 h0.5
  text "G" at 115.924,83.285 h0.5
  text "-" at 24.014,82.904 h2 r90
  text "+" at 22.325,68.347 h2
  text "12V" at 113.865,63.446 h1.2
  text "G" at 114.881,60.652 h1.2
  text "-" at 24.141,59.79 h2 r90
  text "Inverter" at 20.832,58.924 h1.5 r90
  text "G" at 114.373,53.032 h1
  text "IV" at 114.119,50.619 h1
  text "P4" at 114.119,47.952 h1
  text "P3" at 114.119,45.412 h1
  text "+" at 22.325,44.598 h2
  text "P2" at 114.119,42.872 h1
  text "P1" at 114.119,40.332 h1
  text "3V3" at 113.992,37.792 h1
  text "-" at 24.141,36.041 h2 r90
  text "Battery" at 20.713,35.556 h1.5 r90